# Altium PCB pcb.PcbDoc
Units mil, origin at the board's own origin, x right, y up, seen from the top; angles counter-clockwise.
Board outline 6000 x 4000 mil, 2 copper layers (Top Layer, Bottom Layer); 17 components, 20 nets, 121 pads, 35 vias.
Unrouted connection lines stored in the file: 10.
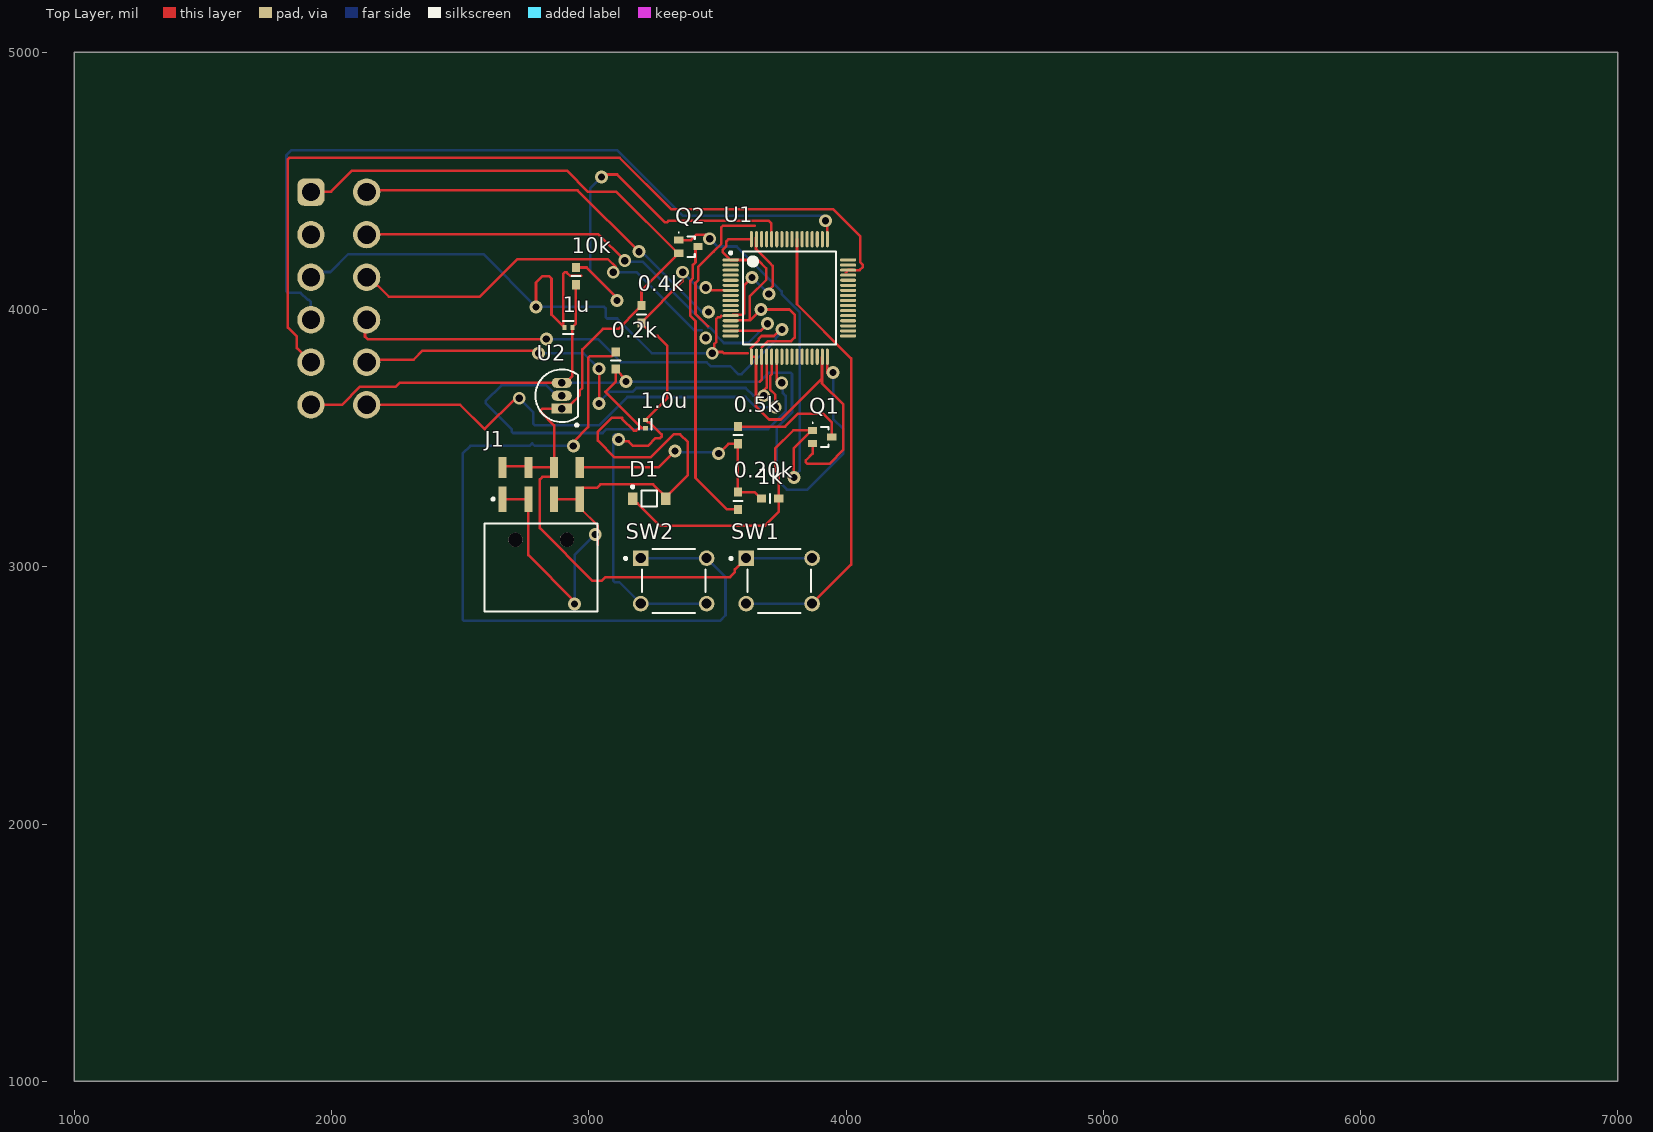
[diagram p0: Top Layer view]
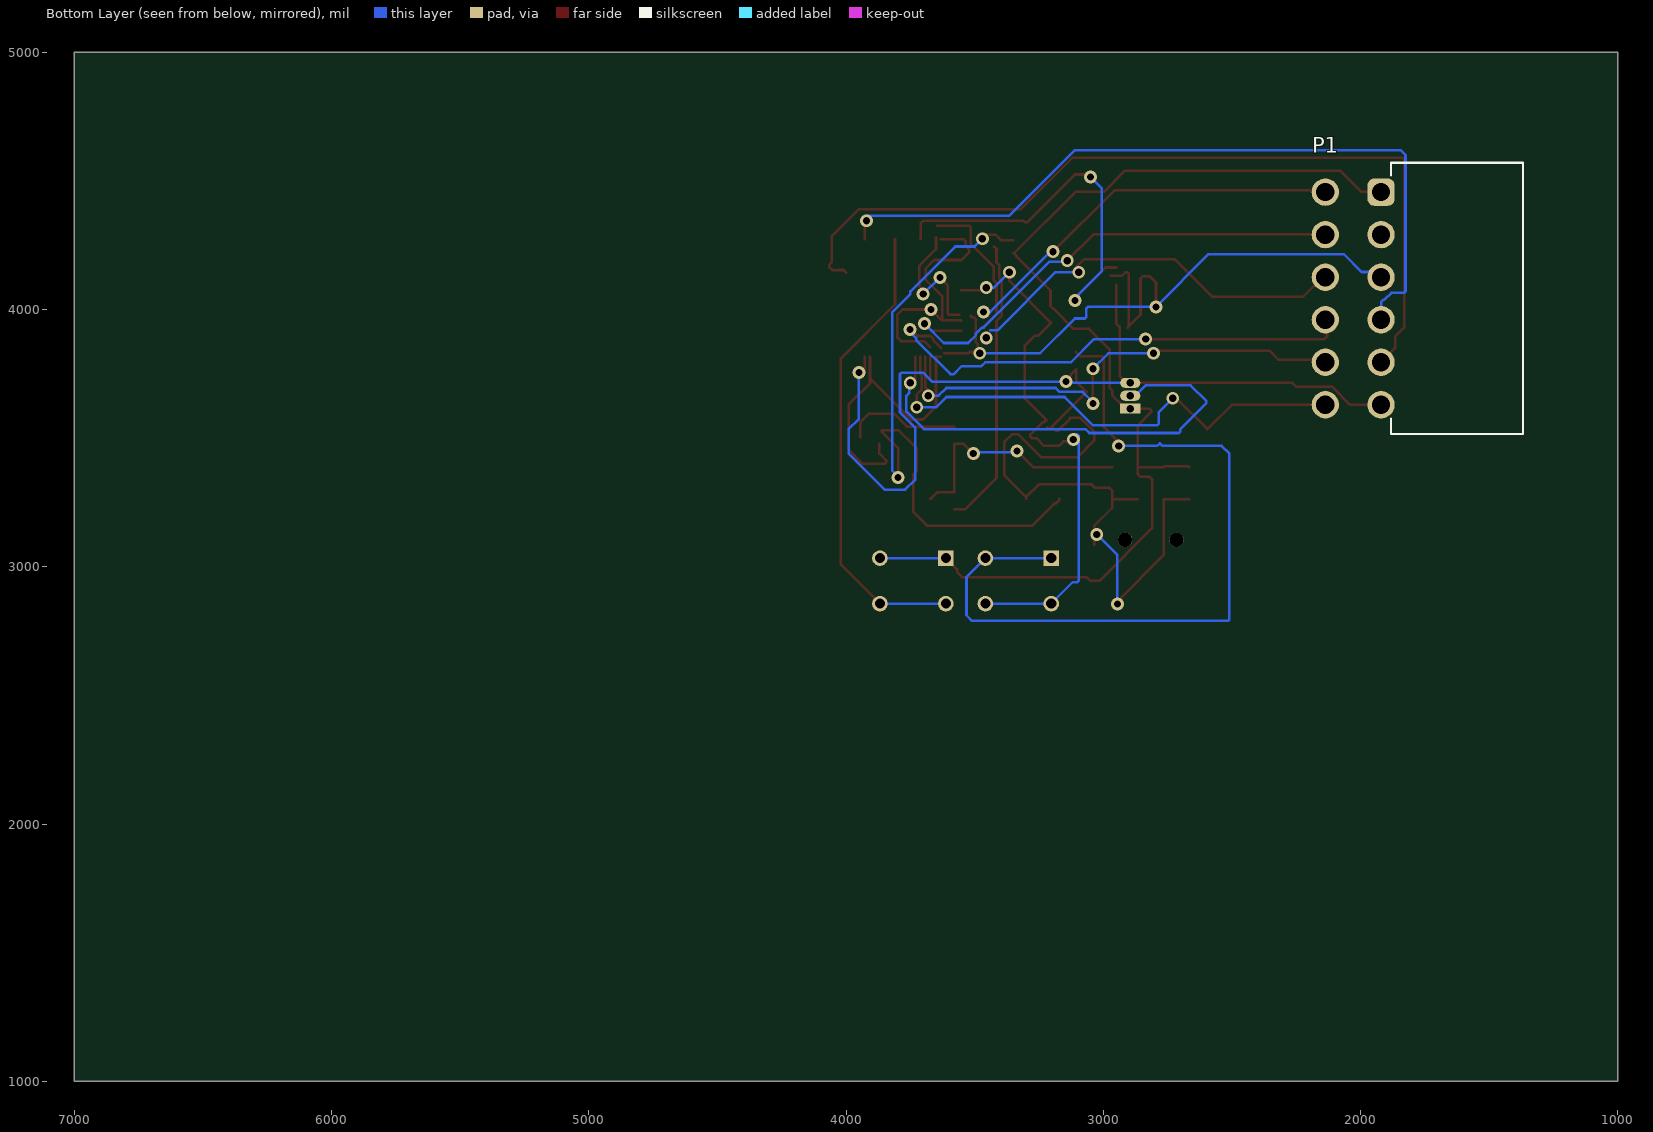
[diagram p1: Bottom Layer view, seen from below]
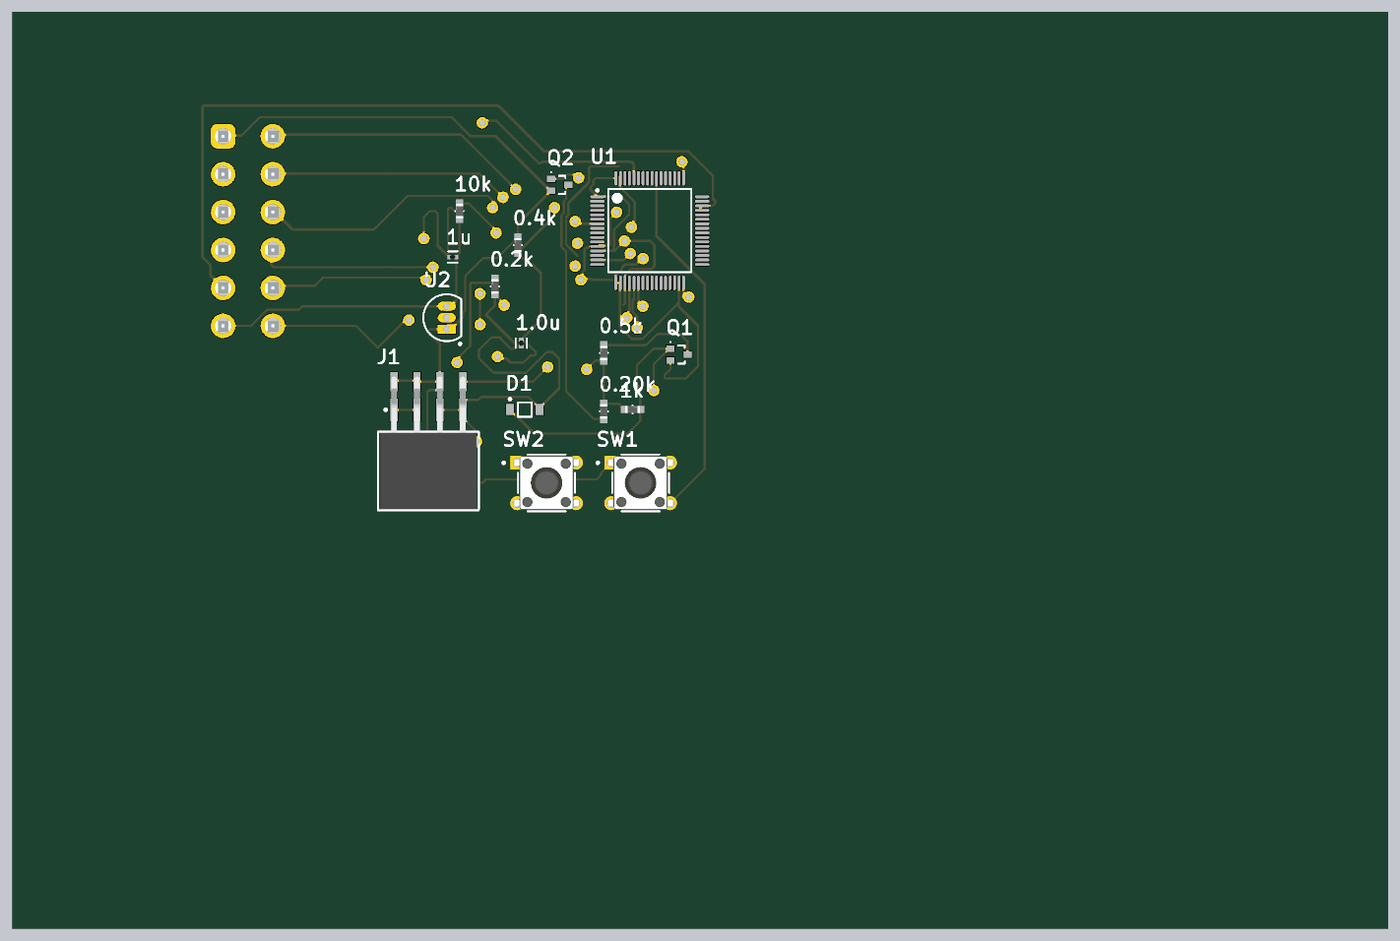
[diagram p2: 3D render of the assembled board from above, using the file's embedded part models]

## Layer stack, top to bottom
Top Solder: solder mask 0.4, Solder Resist, Dk 3.5
Top Layer: signal copper 1.4
Dielectric 1: dielectric 12.6, FR-4, Dk 4.8
Bottom Layer: signal copper 1.4
Bottom Solder: solder mask 0.4, Solder Resist, Dk 3.5

## Board outline
1000,1000 7000,1000 7000,5000 1000,5000

## Design rules (kind name [scope] priority, off if disabled: settings)
Clearance [All] p1: gap=10 ignorepadtopadclearanceinfootprint=FALSE
PolygonConnect [All] p1: connectstyle=Relief reliefconductorwidth=10 reliefentries=4 polygonreliefangle="90 Angle" airgapwidth=10
RoutingVias [All] p1: holewidth=28 width=50 viastyle="Through Hole" minholewidth=28 minwidth=50 maxholewidth=28 maxwidth=50
SolderMaskExpansion [All] p1: expansion=4 istentingtop=FALSE
Width [All] p1: maxlimit=10 minlimit=10 preferedwidth=10
30 further rules are at their usual default settings.

## Components (designator, comment, footprint, x,y, rotation, side; value= is the part's Value field where it differs from the comment)
0.2k "RC0603FR-071RL" FP-RC0603-0_55-MFG 3105,3801.54 r90 top
0.4k "RC0603FR-071RL" FP-RC0603-0_55-MFG 3205,3981.54 r90 top
0.5k "RC0603FR-071RL" FP-RC0603-0_55-MFG 3580,3511.54 r90 top
0.20k "RC0603FR-071RL" FP-RC0603-0_55-MFG 3580,3256.54 r90 top
1.0u "GRM155R71C104KA88D" FP-GRM15-MFG 3220,3554.25 r90 top value=0.10μF
1k "RC0603FR-071RL" FP-RC0603-0_55-MFG 3705,3265 r0 top
1u "GRM155R71C104KA88D" FP-GRM15-MFG 2920.75,3930 r0 top value=0.10μF
10k "RC0603FR-071RL" FP-RC0603-0_55-MFG 2950,4130 r90 top
D1 "MMSZ5239BT1G" ONSC-SOD-123-2-425-04_V 3235,3265 r0 top
J1 "610108249221" 610108249221 2815,2996.73 r0 top
P1 "64901229522" 64901229522 1624.72,4043.03 r90 bottom
Q1 "MMBT3906WT1G" ONSC-SC-70-3-419-04_V 3907.4,3504.41 r0 top
Q2 "MMBT3906WT1G" ONSC-SC-70-3-419-04_V 3387.4,4244.41 r0 top
SW1 "3-1825910-1" FP-3-1825910-1-MFG 3740,2945 r0 top
SW2 "3-1825910-1" FP-3-1825910-1-MFG 3330,2945 r0 top
U1 "STM32F030R8T6TR" STM-LQFP64_L 3780,4045 r0 top
U2 "LM35CZ" Z03A 2895,3665 r0 top

## Footprints (in the part's own frame and the unit in brackets; to place one, negate y for a bottom-side part, rotate by r counter-clockwise, add the part's x,y. Pads: shape width x height; smd on the part's side, far side on the other; paste and mask are expansions set on the pad)
64901229522 [mm] "4.20mm Male Dual Row Angled Header, 12p"
  rrect50% 2.7x2.7 hole 1.8: 1(10.5,7.5)
  round 2.7 hole 1.8: 2(6.3,7.5) 3(2.1,7.5) 4(-2.1,7.5) 5(-6.3,7.5) 6(-10.5,7.5) 7(10.5,13) 8(6.3,13) 9(2.1,13) 10(-2.1,13) 11(-6.3,13) 12(-10.5,13)
  silkscreen extent -13.4,-6.5 13.4,6.5, body extent -13.2,-6.4 13.52,13.57, height 11.43
610108249221 [mm] "Socket Header, Pitch 2.54 mm, SMT, Angled, dual row, 8p"
  rect 0.8x2.5 smd: 1(-3.81,6.76) 3(-1.27,6.76) 5(1.27,6.76) 7(3.81,6.76)
  rect 0.8x2.1 smd: 2(-3.81,9.89) 4(-1.27,9.89) 6(1.27,9.89) 8(3.81,9.89)
  round 1.4 hole 1.4 unplated: MH1(-2.54,2.75) MH2(2.54,2.75)
  silkscreen extent -5.58,-4.35 5.58,6.9, body extent -5.33,-4.25 5.33,10.44, height 5.03
FP-3-1825910-1-MFG [mm]
  rect 1.54x1.54 hole 0.99 paste-2539.97 mask+0: 1(-3.25,2.25)
  round 1.54 hole 0.99 paste-2539.97 mask+0: 2(3.25,2.25) 3(-3.25,-2.25) 4(3.25,-2.25)
  silkscreen extent -4.87,-3.14 3.14,3.14, body extent -4.12,-3.24 4.12,3.24, height 0.25
FP-GRM15-MFG [mm]
  rect 0.4x0.5 smd paste+0 mask+0: 1(-0.4,0) 2(0.4,0)
  silkscreen extent -0.53,-0.62 0.53,0.62, body extent -0.7,-0.38 0.7,0.38, height 0.25
FP-RC0603-0_55-MFG [mm]
  rect 0.9x0.8 smd paste+0 mask+0: 1(-0.85,0) 2(0.85,0)
  silkscreen extent 0,-0.45 0,0.45, body extent -1.4,-0.55 1.4,0.55, height 0.25
ONSC-SC-70-3-419-04_V [mm] "SOT23, 3-Leads, Body 2x1.25mm, Pitch 0.65mm"
  rect 0.9x0.7 smd: 1(-0.95,0.65) 2(-0.95,-0.65) 3(0.95,0)
  silkscreen extent -1,-1 0.62,1.45, body extent -0.63,-1 0.63,1, height 1
ONSC-SOD-123-2-425-04_V [mm] "SOD, 2-Leads, Body 2.69x1.6mm"
  rect 0.91x1.22 smd: 1(-1.635,0) 2(1.635,0)
  silkscreen extent -1.76,-0.8 0.78,1.28, body extent -1.35,-0.8 1.35,0.8, height 1.35
STM-LQFP64_L [mm] "QFP, 64-Leads, Body 10x10mm, Pitch 0.5mm, IPC High Density"
  oval 1.6x0.3 smd: 1(-5.8,3.75) 2(-5.8,3.25) 3(-5.8,2.75) 4(-5.8,2.25) 5(-5.8,1.75) 6(-5.8,1.25) 7(-5.8,0.75) 8(-5.8,0.25) 9(-5.8,-0.25) 10(-5.8,-0.75) 11(-5.8,-1.25) 12(-5.8,-1.75) 13(-5.8,-2.25) 14(-5.8,-2.75) 15(-5.8,-3.25) 16(-5.8,-3.75) 33(5.8,-3.75) 34(5.8,-3.25) 35(5.8,-2.75) 36(5.8,-2.25) 37(5.8,-1.75) 38(5.8,-1.25) 39(5.8,-0.75) 40(5.8,-0.25) 41(5.8,0.25) 42(5.8,0.75) 43(5.8,1.25) 44(5.8,1.75) 45(5.8,2.25) 46(5.8,2.75) 47(5.8,3.25) 48(5.8,3.75)
  oval 0.3x1.6 smd: 17(-3.75,-5.8) 18(-3.25,-5.8) 19(-2.75,-5.8) 20(-2.25,-5.8) 21(-1.75,-5.8) 22(-1.25,-5.8) 23(-0.75,-5.8) 24(-0.25,-5.8) 25(0.25,-5.8) 26(0.75,-5.8) 27(1.25,-5.8) 28(1.75,-5.8) 29(2.25,-5.8) 30(2.75,-5.8) 31(3.25,-5.8) 32(3.75,-5.8) 49(3.75,5.8) 50(3.25,5.8) 51(2.75,5.8) 52(2.25,5.8) 53(1.75,5.8) 54(1.25,5.8) 55(0.75,5.8) 56(0.25,5.8) 57(-0.25,5.8) 58(-0.75,5.8) 59(-1.25,5.8) 60(-1.75,5.8) 61(-2.25,5.8) 62(-2.75,5.8) 63(-3.25,5.8) 64(-3.75,5.8)
  silkscreen extent -5.92,-4.6 4.6,4.6, body extent -5,-5 5,5, height 1.6
Z03A [mm] "TO, Flat Index; 3 In-Line, Axial Leads; Body Dia. 5mm; Leads 0.55 x 0.50 mm (max)"
  rect 2x1 hole 0.75: 1(0,-1.27)
  oval 2x1 hole 0.75: 2(0,0) 3(0,1.27)
  silkscreen extent -2.6,-3.02 1.61,2.6, body extent -2.6,-2.61 1.6,2.61, height 5.2

## Part data
0.2k 0.4k 0.5k 0.20k 1k 10k: library part CMP-00621-41203676-1, "RC0603FR-071RL SMD Chip Resistor, 1 Ohm, ± 1%, 100 mW, 0603 [1608 Metric], Thick Film, General Purpose", Case Code (Imperial)=0603, Case Code (Metric)=1608, Max Operating Temperature=155°C, Max Power Dissipation=100mW, Min Operating Temperature=-55°C, Resistance=1Ω, Temperature Coefficient=200ppm/°C, Tolerance=1%, Voltage Rating=50V, Case/Package=0603, Composition="Thick Film", Depth=800µm, Features="Moisture Resistant", Height=500µm, Lead Free="Lead Free", Length=1.6002mm, NexarPartId=41203676, Number of Pins=2, Number of Terminations=2, Packaging="Tape & Reel", Power Rating=100mW, REACH SVHC=Unknown, RoHS=Compliant, Schedule B="8533210045, 8533210045", Termination=SMD/SMT, Voltage Rating (DC)=50V, Width=787.4µm
1.0u 1u: library part CMP-2100-03641-2, "CAP CER 0.1UF 16V X7R 0402", Capacitance=0.10μF, Manufacturer=Murata, Package=GRM15, Temperature="-55°C to +125°C", Temperature Characteristic=X7R, Temperature Range High=+125°C, Temperature Range Low=-55°C, Tolerance=10%, Voltage Rating=16Vdc, Category=Cap, ComponentLink2Description=Datasheet, ComponentLink2URL=https://search.murata.co.jp/Ceramy/image/img/A01X/G101/ENG/GRM155R71H471KA01-01A.pdf, Device Class L1="Passive Components", Device Class L2=Capacitors, Device Class L3="Ceramic Capacitors", Digikey Description="CAP CER 0.1UF 16V X7R 0402", Height=0.55mm, Ipc Land Pattern Name=CAPC10050X219, Lead Free=yes, Manufacturer Part Number=GRM155R71C104KA88D, Material=Ceramic, Mouser Description="0402 0.1 uF 16V ±10 % Tolerance X7R SMT Multilayer Ceramic Capacitor", Octopart=https://octopart.com/grm155r71c104ka88d-murata-196880, RoHS=TRUE, Standoff Height=0mm
D1: library part CMP-1060-00547-1, "Zener Voltage Regulator, 500 mW, 2-Pin SOD-123, Pb-Free, Tape and Reel", Manufacturer="On Semiconductor", ComponentLink1Description="Manufacturer URL", ComponentLink1URL=http://www.onsemi.com/, ComponentLink2Description=Datasheet, ComponentLink2URL=http://www.onsemi.com/pub_link/Collateral/MMSZ5221BT1-D.PDF, ComponentLink3Description="Package Specification", ComponentLink3URL=http://www.onsemi.com/pub_link/Collateral/425-04.PDF, DatasheetVersion="Rev. 12", Mounting Technology="Surface Mount", P Max (W)=0.5, PackageDescription="2-Pin SOD, Body 1.6 x 2.69 mm", PackageReference=SOD-123-2-425-04, PackageVersion="Rev. G, 10/2009", Packing="Tape and Reel", PartNumber=MMSZ5239BT1G, RoHS=Pb-Free, VZ Typ (V)=9.1
J1: library part CMP-1502-01388-3, Color=Black, Contact Resistance=20mΩ, Current Rating=3A, Operating Supply Voltage=250V, Connector Type="Header, Socket", Contact Material=Copper, Contact Plating=Gold, Gender=Female, Lead Pitch=2.54mm, Mount="Surface Mount", NexarPartId=52645092, Number of Contacts=8, Number of Pins=8, Number of Positions=8, Number of Rows=2, Packaging="Tape and Reel", Pitch=2.54mm, REACH SVHC=Unknown, RoHS=Compliant, Row Spacing=2.54mm, Termination=Solder
P1: library part CMP-1502-00522-2, Color=White, Contact Resistance=10mΩ, Current Rating=6A, Insulation Resistance=1GΩ, Max Operating Temperature=105°C, Min Operating Temperature=-40°C, Operating Supply Voltage=600V, Connector Type="Male Pin, Socket", Contact Material=Copper, Contact Plating=Tin, Fastening Type=Ramp, Gender=Male, Height=12.8mm, Lead Pitch=4.2mm, Length=26.4mm, Mount="Through Hole", NexarPartId=23024621, Number of Contacts=12, Number of Pins=12, Number of Positions=12, Number of Rows=2, Pitch=4.2mm, REACH SVHC=Unknown, RoHS=Compliant, Row Spacing=4.191mm, Termination=Solder, Width=26.4mm
Q1 Q2: library part CMP-1048-00381-1, "General Purpose Transistor, PNP Silicon, 3-Pin SC70, Pb-Free, Tape and Reel", Manufacturer="On Semiconductor", ComponentLink1Description="Manufacturer URL", ComponentLink1URL=http://www.onsemi.com/, ComponentLink2Description=Datasheet, ComponentLink2URL=http://www.onsemi.cn/pub_link/Collateral/MMBT3904WT1-D.PDF, ComponentLink3Description="Package Specification", ComponentLink3URL=http://www.onsemi.cn/pub_link/Collateral/419-04.PDF, DatasheetVersion="Rev. 8", fT Min (MHz)=250, IC Continuous (A)=-0.2, Mounting Technology="Surface Mount", PackageDescription="3-Pin Small Outline Transistor, Body 2 x 1.25 mm, Pitch 0.65 mm", PackageReference=SC-70-3-419-04, PackageVersion="Rev. N, 11/2008", Packing="Tape and Reel", PartNumber=MMBT3906WT1G, Polarity=PNP, RoHS=TRUE
SW1 SW2: library part CMP-03407-000001-1, "SWITCH TACTILE SPST-NO 0.05A 24V", Contact Current Rating=50mA, Contact Resistance=100mΩ, Manufacturer="TE Connectivity", Operating Force=160gf, Package=0, Temperature="-35°C to +85°C", Temperature Range High=+85°C, Temperature Range Low=-35°C, Automotive=No, Category=Switch, ComponentLink2Description=Datasheet, ComponentLink2URL=https://www.te.com/commerce/DocumentDelivery/DDEController?Action=srchrtrv&DocNm=1825910&DocType=Customer+Drawing&DocLang=English, Device Class L1=Electromechanical, Device Class L2=Switches, Device Class L3="Tactile Switches", Digikey Description="SWITCH TACTILE SPST-NO 0.05A 24V", Electromechanical Life=100000Cycles, Height=17.3mm, Lead Free=Yes, Manufacturer Part Number=3-1825910-1, Mount="Through Hole", Octopart=https://octopart.com/3-1825910-1-te+connectivity-46506874, RoHS=TRUE, Throw Configuration=SPST-NO
U1: library part CMP-0304-00068-2, "ARM Cortex-M0 32-bit MCU, 64 KB Flash, 8 KB Internal RAM, 55 I/Os, 64-Pin LQFP, -40 to 85 degC, Tape and Reel", I/Os (High Current)=55, Manufacturer=STMicroelectronics, Operating Frequency(F) (Processor speed) (MHz)=48, Package Description="64-Pin Low-profile Quad Flat Package, Body 10 x 10 mm, Pitch 0.5 mm", Package Reference=LQFP64, Supply Voltage(Vcc) min (V)=2.4, ComponentLink1Description="Manufacturer URL", ComponentLink1URL=http://www.st.com/, ComponentLink2Description=Datasheet, ComponentLink2URL=http://www.st.com/st-web-ui/static/active/en/resource/technical/document/datasheet/DM00088500.pdf, Core="ARM Cortex-M0", DatasheetVersion="Rev. 2", FLASH Size (Prog) (kB)=64, Internal RAM Size (kB)=8, Mounting Technology="Surface Mount", Packing="Tape and Reel", PartNumber=STM32F030R8T6TR
U2: library part CMP-0066-00027-2, "Precision Centigrade Temperature Sensor, 3-pin TO-92", Manufacturer="National Semiconductor", PackageTopMarking=NSXYTT*LM35*CZ, PowerWise=N, Code_JEDEC=TO-226-AA, ComponentLink1Description="LM35 Datasheet", ComponentLink1URL=http://www.national.com/ds/LM/LM35.pdf, ComponentLink2Description="LM35 Web Page", ComponentLink2URL=http://www.national.com/pf/LM/LM35.html, ComponentLink3Description="Z03A Package Page", ComponentLink3URL=http://www.national.com/packaging/folders/z03a.html, CompType="Temp Sensor IC", DatasheetVersion=Nov-2000, PackageDescription="TO-92, Molded, 3 Lead", PackageReference=Z03A, PackageVersion="revG, Sep-2000", PinCount=3, RevisionNote="Component URLs added", RoHS=N

## Via types
v1: diameter 50, hole 28, Top Layer to Bottom Layer, 35 vias

## Nets (pads, with @x,y where several pads share a name; then routed paths per layer and width w, separated by ;. In a path a pad name is that pad's centre, name@x,y a point inside that pad or via, vN(x,y) a via of type N, cw(c..) or ccw(c..) an arc to the next point about the centre after c; other vN are vias at no path point)
Net0.2k_1: 0.2k.1 1.0u.1 1u.2 10k.1 D1.2 J1.1 J1.3 J1.5 J1.7 P1.2 P1.6 U1.1 U1.13 U1.19 U1.32 U1.64 U2.3 | length 6169
  Top Layer w10: P1.6 2040.16,3629.65 2110.51,3700 2250,3700 2265,3715 U2.3 ; J1.1 J1.3 2765,3045 v1@2945,2865 ; J1.5 J1.7 ; U2.3@2895,3699.69 2936.5,3741.18 1u.2 ; 1u.2@2936.5,3931.97 2950,3945.47 10k.1 ; 3035,3085 3035,3159.41 2965,3229.41 J1.7 ; 0.2k.1 0.2k.1@3105,3766.1 ; v1(3145,3720) 3145,3726.1 0.2k.1@3105,3766.1 ; 3203.62,3541.38 3065,3680 3105,3720 0.2k.1@3105,3766.1 ; 1.0u.1@3217.13,3541.38 1.0u.1 3193.5,3538.5 3184.14,3529.14 3175.86,3529.14 3130,3575 3130,3579.14 3089.14,3579.14 3035,3525 3035,3490 3100,3425 3240,3425 3330,3515 3355,3515 3385,3485 3385,3356.73 D1.2@3299.37,3271.1 ; D1.2 D1.2@3299.37,3271.1 ; U1.13 3552.87,3957.64 3627.64,3957.64 ; U1.64 3543.35,4273.35 3535,4265 3535,4246.72 3520.43,4232.15 3520.43,4223.86 U1.1 3657.36,4192.64 3690,4160 3690,4115 3625,4050 3625,3960.28 3627.64,3957.64 ; 3672.3,3852.7 3696.66,3877.05 3786.19,3877.05 3800,3890.86 3800,3980 3780,4000 v1(3670,4000) 3627.64,3957.64 ; J1.7 2965,3296.34 2975.75,3307.09 3032.09,3307.09 3045,3320 3250.47,3320 D1.2@3299.37,3271.1
  Bottom Layer w10: U2.3 v1@3135,3715 ; v1(2945,2855) 2945,3045 v1(3025,3125) ; v1(3145,3720) 3665,3720
Net0.2k_2: 0.2k.2 SW2.1 SW2.2 | length 3105
  Top Layer w10: v1@2940,3485 2997.87,3542.87 2997.87,3812.01 3003.73,3817.87 3088.39,3817.87 3092.81,3822.28 3094.25,3822.28 3105,3833.03 0.2k.2
  Bottom Layer w10: v1(2940,3470) 2790,3470 2780,3480 2770,3470 2540,3470 2510,3440 2510,2795.86 2515.86,2790 3510,2790 3531.53,2811.53 3531.53,2960 SW2.2 SW2.1
Net0.4k_1: 0.4k.1 1.0u.2 SW2.3 SW2.4 U1.7 | length 2229.2
  Top Layer w10: v1(3116.27,3495) 3123.92,3487.35 3154.91,3487.35 3172.25,3470 3230,3470 3260,3500 3277.43,3500 3283.29,3505.86 3283.29,3514.14 3236.06,3561.38 3230.59,3561.38 1.0u.2@3221.97,3570 ; 0.4k.1 3205,3946.1 3253.42,3897.68 3267.32,3897.68 3305,3860 3305,3655 3224.84,3574.84 3224.84,3572.87 1.0u.2@3221.97,3570 ; 0.4k.1@3205,3950.04 3365,4110.04 v1(3365,4145) ; 1.0u.2 1.0u.2@3221.97,3570 ; v1(3455,4085) 3465.82,4085 3476.3,4074.53 U1.7 U1.7@3550.82,4075.36
  Bottom Layer w10: v1@3110,3515 3100.86,3515 3095,3509.14 v1@3095,3495 ; v1(3116.27,3495) v1@3095,3495 ; v1(3365,4145) 3425,4085 v1(3455,4085) ; SW2.4 SW2.3 3118.47,2940 3100.86,2940 3095,2945.86 v1@3095,3495
Net0.4k_2: 0.4k.2 J1.2 J1.4 J1.6 P1.1 Q2.2 SW1.1 SW1.2 U2.1 | length 4416.1
  Top Layer w10: P1.1@1927.88,4458.7 1998.7,4458.7 2080,4540 2915,4540 2997.56,4457.44 3107.44,4457.44 Q2.2@3346.06,4218.82 ; J1.2 2668.9,3390 2761.1,3390 J1.4 J1.6 ; U2.1 2820,3615 2814.14,3609.14 2814.14,3600.86 2865,3550 J1.6 ; U2.1@2895,3630.32 2929.05,3630.32 2965,3666.26 2965,3685 2975,3695 2975,3845 3055,3925 3115,3925 3192.28,4002.28 3194.25,4002.28 3205,4013.03 0.4k.2 3205,4073.82 3337.28,4206.1 3337.28,4210.04 Q2.2@3346.06,4218.82 ; Q2.2 Q2.2@3346.06,4218.82 ; SW1.1 3567.94,2989.47 3567.94,2978.8 3549.14,2960 3065,2960 3050,2945 3014.81,2945 2810,3149.81 2810,3340 2819.76,3349.76 2854.25,3349.76 2865,3360.51 J1.6
  Bottom Layer w10: SW1.1 SW1.2
Net0.5k_1: 0.5k.1 0.20k.2 1k.1 J1.8 | length 951.3
  Top Layer w10: J1.8 3271.1,3386.1 v1(3335,3450) ; v1(3505,3440) 3543.07,3478.07 0.5k.1 0.20k.2 3644.57,3290 3669.57,3265 1k.1
  Bottom Layer w10: v1(3335,3450) 3340,3445 3500,3445 v1(3505,3440)
Net0.5k_2: 0.5k.2 Q1.3 | length 455.7
  Top Layer w10: 0.5k.2 3763.28,3545 3813.28,3595 3910,3595 3944.8,3560.2 Q1.3
Net0.20k_1: 0.20k.1 Q2.3 | length 1136.1
  Top Layer w10: Q2.3 3423.78,4244.41 3415,4235.63 3415,4183.28 3405,4173.28 3405,4121.72 3395,4111.72 3395,3975.15 3415,3955.15 3415,3345 3536.93,3223.07 0.20k.1
Net1k_2: 1k.2 D1.1 Q1.1 Q2.1 | length 2523.6
  Top Layer w10: D1.1 3170.63,3258.9 3183.54,3245.98 3189.65,3245.98 3275.63,3160 3685,3160 3738.47,3213.47 1k.2 3738.47,3360.28 3724.14,3374.61 3724.14,3459.14 3795,3530 3860,3530 3860,3523.94 3797.5,3461.44 v1(3797.5,3347.5) ; Q2.1 3397.68,4270 3417.68,4290 v1@3470,4290
  Bottom Layer w10: v1(3470,4275) 3500,4245 3575,4245 3750,4070 3750,4060 3820,3990 3820,3373.28 v1@3790,3343.28
Net1u_1: 1u.1 P1.3 Q1.2 U1.12 U1.18 U1.31 U1.63 | length 3672.1
  Top Layer w10: v1(2795,4010) 2795,4105 2820,4130 2845,4130 2855,4120 2855,3980 1u.1 ; v1@3470,3835 3520,3835 3525,3830 3617.8,3830 ; v1(3480,3830) 3487.65,3837.65 3487.65,3866.09 3495.78,3874.22 3495.78,3964.14 3501.64,3970 3510.08,3970 3515.04,3974.96 ; 3631.14,3816.65 U1.18 3650.39,3815 3650,3815 3650,3623.43 3701.01,3572.43 3747.43,3572.43 3906.73,3731.73 ; Q1.2 3870,3440 3844.14,3414.14 3844.14,3405.86 3850,3400 3935,3400 3990,3455 3990,3630 3906.73,3713.27 3906.73,3731.73 ; U1.31 3906.73,3815.43 3906.73,3731.73
  Bottom Layer w10: P1.3@1927.88,4127.99 1945.91,4146.03 1996.03,4146.03 2065,4215 2590,4215 v1(2795,4010) 3060,4010 3065.86,4004.14 3065.86,3970.86 3071.72,3965 3110,3965 3245,3830 v1(3480,3830)
  other v1: 3680,3665
Net10k_2: 10k.2 U1.60 | length 1561.9
  Top Layer w10: 10k.2 2991.54,4163.46 3110,4045 v1(3110,4035) ; v1@3055,4525 3110,4525 3295.86,4339.14 3304.14,4339.14 3310,4345 3700,4345 3709.88,4335.12 3709.88,4274.57 U1.60
  Bottom Layer w10: v1(3050,4515) 3005,4470 3005,4150 3110,4045 v1(3110,4035)
NetP1_4: P1.4 U1.49 | length 2988.9
  Top Layer w10: v1(3920,4345) 3927.64,4337.36 U1.49
  Bottom Layer w10: P1.4 1920,4029.14 1911,4038.14 1906.86,4038.14 1880,4065 1830.86,4065 1825,4070.86 1825,4600 1845,4620 3110,4620 3365,4365 v1@3915,4365
NetP1_5: P1.5 U1.46 | length 3395.4
  Top Layer w10: P1.5 1865,3850 1865,3895 1830,3930 1830,4584.14 1835.86,4590 3120,4590 3320,4390 3950,4390 4054.84,4285.16 4054.84,4183.98 4065.27,4173.55 4065.27,4165.27 4053.27,4153.27 U1.46 4009.57,4154.49 U1.46@4025.35,4154.49 ; 4000,4144.09 U1.46@4008.35,4152.43
NetP1_7: P1.7 U1.14 | length 1484.3
  Top Layer w10: P1.7@2151.81,4463.39 2956.61,4463.39 v1(3195,4225)
  Bottom Layer w10: v1(3195,4225) 3205,4225 v1@3440,3990
  other v1: 3465,3990
NetP1_8: P1.8 U1.15 | length 1915.8
  Top Layer w10: P1.8@2144.41,4293.35 3036.65,4293.35 v1(3140,4190) ; U1.15 3667.05,3917.05 v1(3695,3945)
  Bottom Layer w10: v1(3140,4190) 3145,4185 3210,4185 3465,3930 3471.57,3930 3495,3906.57 3495,3900 3525,3870 3620,3870 v1(3695,3945)
NetP1_9: P1.9 U1.16 | length 1504.6
  Top Layer w10: P1.9@2144.41,4127.99 2222.4,4050 2576.32,4050 2722.5,4196.18 3073.82,4196.18 v1@3105,4165
  Bottom Layer w10: v1(3095,4145) 3185,4145 3410,3920 3440,3920
NetP1_10: P1.10 U1.17 | length 1983.9
  Top Layer w10: P1.10 2130,3953.82 2130,3895 2140,3885 2820,3885 v1@2830,3895 ; 3630,3850 3660,3880 3660,3885 3672.05,3897.05 3719.81,3897.05 3745.48,3922.72 v1(3750.71,3922.72)
  Bottom Layer w10: v1(2835,3885) 3035,3885 3125,3795 3458.43,3795 3473.43,3780 3550,3780 3580.86,3749.14 3594.14,3749.14 3727.39,3882.39 3727.39,3889.46 3750.71,3912.78 v1(3750.71,3922.72)
NetP1_11: P1.11 U1.20 | length 702.1
  Top Layer w10: P1.11 2146.88,3805.35 2319.65,3805.35 2354.3,3840 v1@2820,3840
  other v1: 2805,3830
NetP1_12: P1.12 U1.21 | length 2001.5
  Top Layer w10: P1.12 2500.35,3629.65 2595,3535 v1@2715,3655 ; U1.21 3711.1,3747.67 3705,3741.57 3705,3688.7 3725.04,3668.66 v1(3725.04,3619.89)
  Bottom Layer w10: v1(2730,3655) 2785,3600 2785,3555.86 2790.86,3550 3040,3550 3150,3660 3610,3660 3650.11,3619.89 v1(3725.04,3619.89)
NetSW1_3: SW1.3 SW1.4 U1.55 | length 1823
  Top Layer w10: U1.55 3809.53,4020.47 4020,3810 4020,3008.47 SW1.4
  Bottom Layer w10: SW1.3 SW1.4
NetU1_22: U1.22 U2.2 | length 1717.6
  Bottom Layer w10: U2.2 2875.32,3665 2835.32,3705 2660,3705 2599.14,3644.14 2599.14,3635.86 2700,3535 2700,3525.86 2705.86,3520 3053.72,3520 3068.72,3535 3696.72,3535 3765.04,3603.32 3765.04,3664.55 3754.59,3675 3754.59,3710.41 v1(3750,3715)
pads on no net: J1.MH1 J1.MH2 U1.2 U1.3 U1.4 U1.5 U1.6 U1.8 U1.9 U1.10 U1.11 U1.23 U1.24 U1.25 U1.26 U1.27 U1.28 U1.29 U1.30 U1.33 U1.34 U1.35 U1.36 U1.37 U1.38 U1.39 U1.40 U1.41 U1.42 U1.43 U1.44 U1.45 U1.47 U1.48 U1.50 U1.51 U1.52 U1.53 U1.54 U1.56 U1.57 U1.58 U1.59 U1.61 U1.62
copper on no net: | length 4115.2
  Top Layer w10: 2900,3940 2900,4138.79 2905.86,4144.64 2914.14,4144.64 2928.04,4130.75 2970.47,4130.75 ; v1(3040,3635) v1(3040,3770) ; 3465,3935 3463.43,3935 3415,3983.43 3415,4103.43 3425,4113.43 3425,4165 3485,4225 3515,4255 3515,4319.14 3520.86,4325 3645,4325 ; 3560,3980 3600,3980 3605,3985 3605,4090 3605,4095 v1(3635,4125) ; 3650,4280 3650,4235 3705,4180 3715,4170 3715,4090 v1@3690,4065 ; 3665,3720 3671.73,3726.73 3671.73,3816.65 ; 3670,3670 3670,3675 3691.42,3696.42 3691.42,3816.65 ; 3730.79,3816.65 3730.79,3719.21 3735,3715 ; v1@3927.64,3752.36 3927.64,3816.65
  Bottom Layer w10: 2805,3830 2980,3830 v1(3040,3770) ; v1@3047.33,3647.33 3080,3680 3170,3680 3185,3695 3610,3695 3640,3665 3670,3665 ; v1(3635,4125) v1(3700,4060) ; 3665,3720 3700,3755 3784.14,3755 3790,3749.14 3790,3600 3730,3540 3730,3340 3770,3300 3850,3300 3990,3440 3990,3535 3950,3575 v1(3950,3755)
  other v1: 3455,3890